# EAGLE board m14500v1 (EAGLE 3.55), part 1 of 2
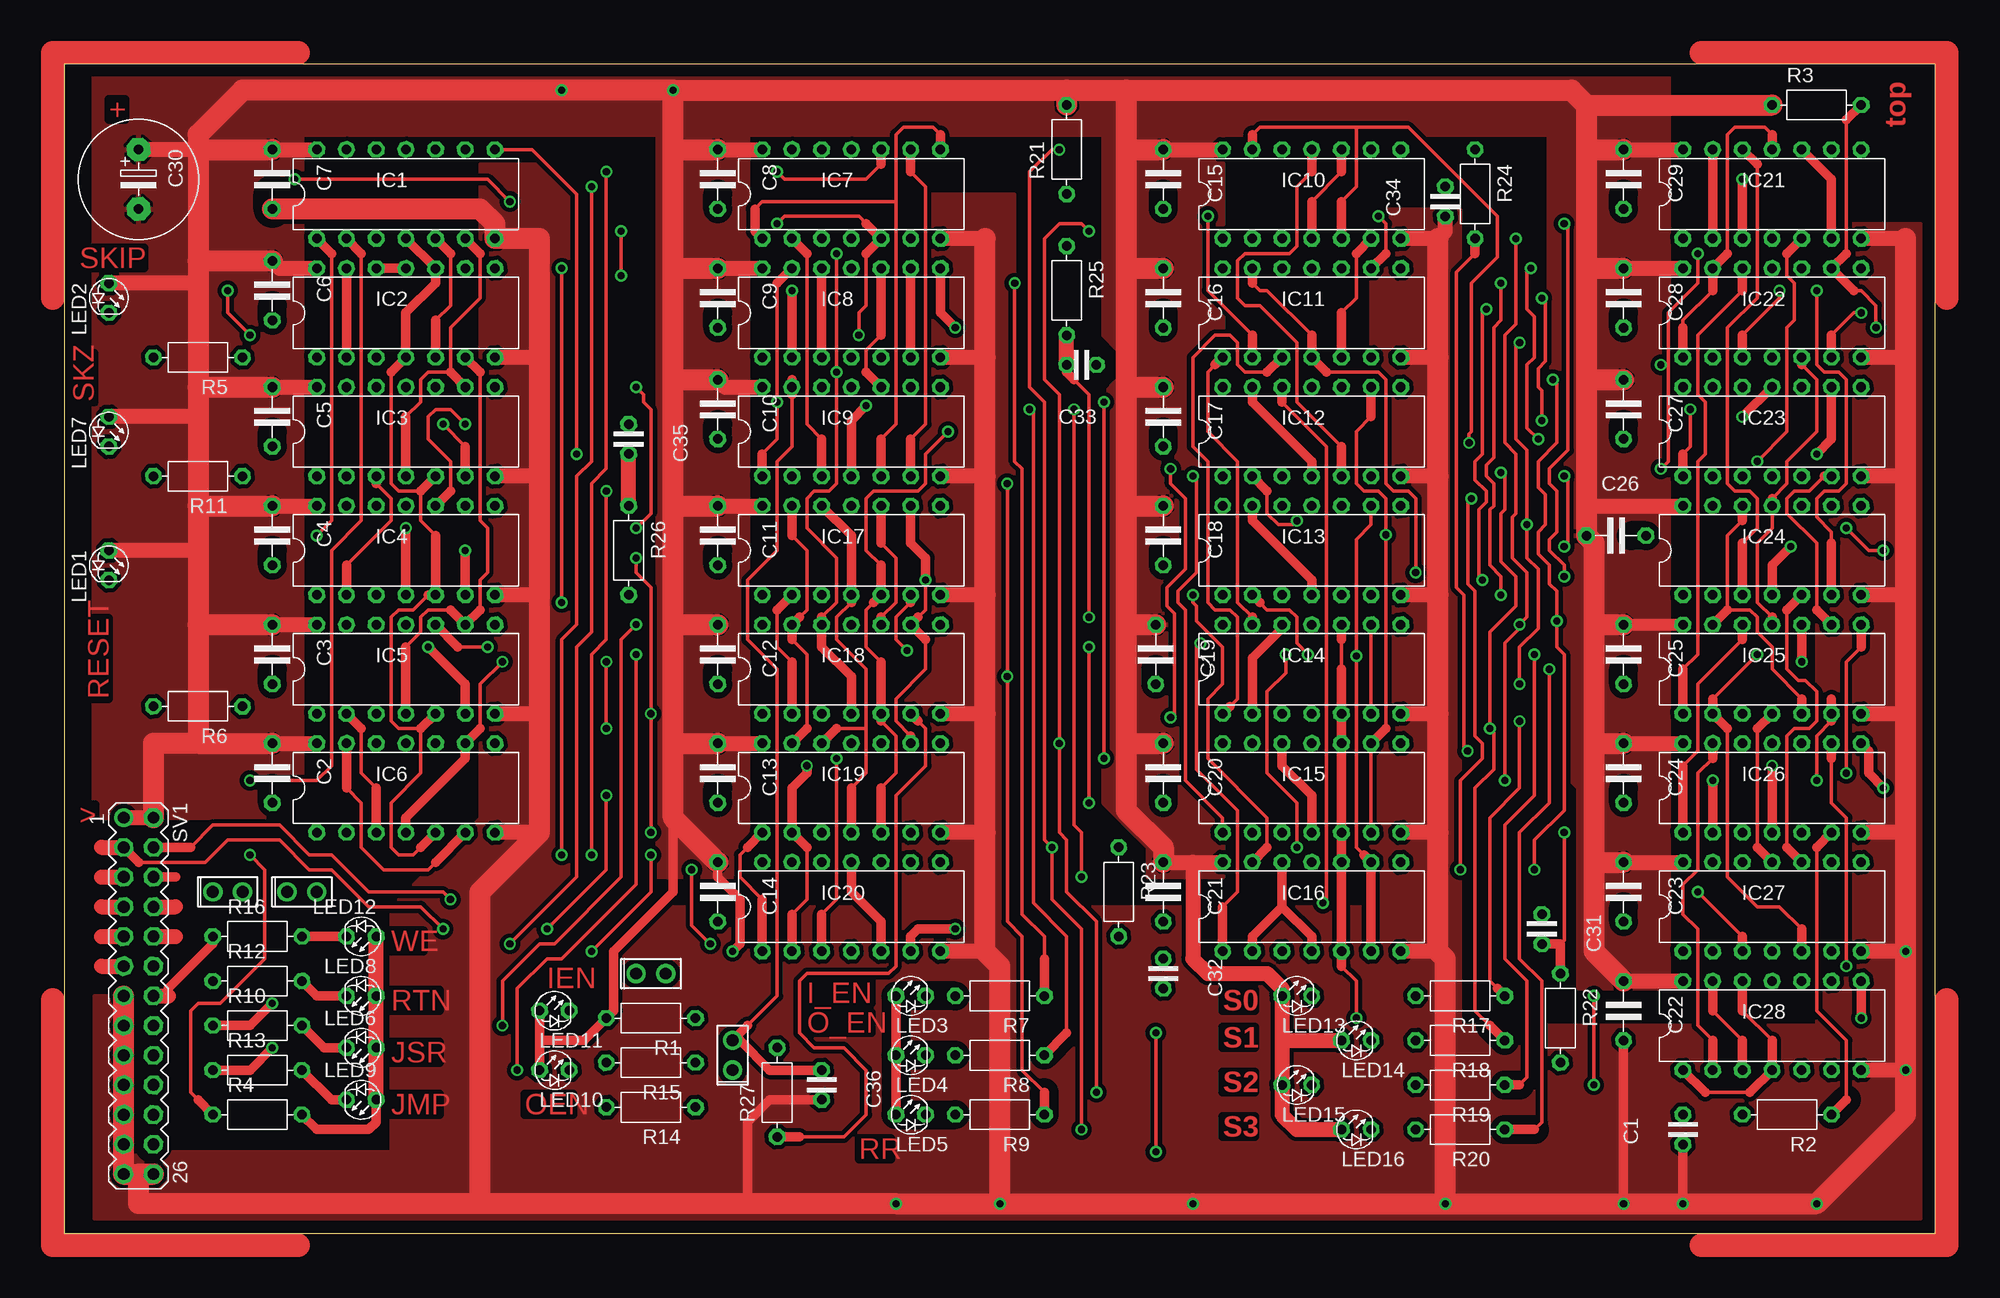
[diagram p0: board, top side]
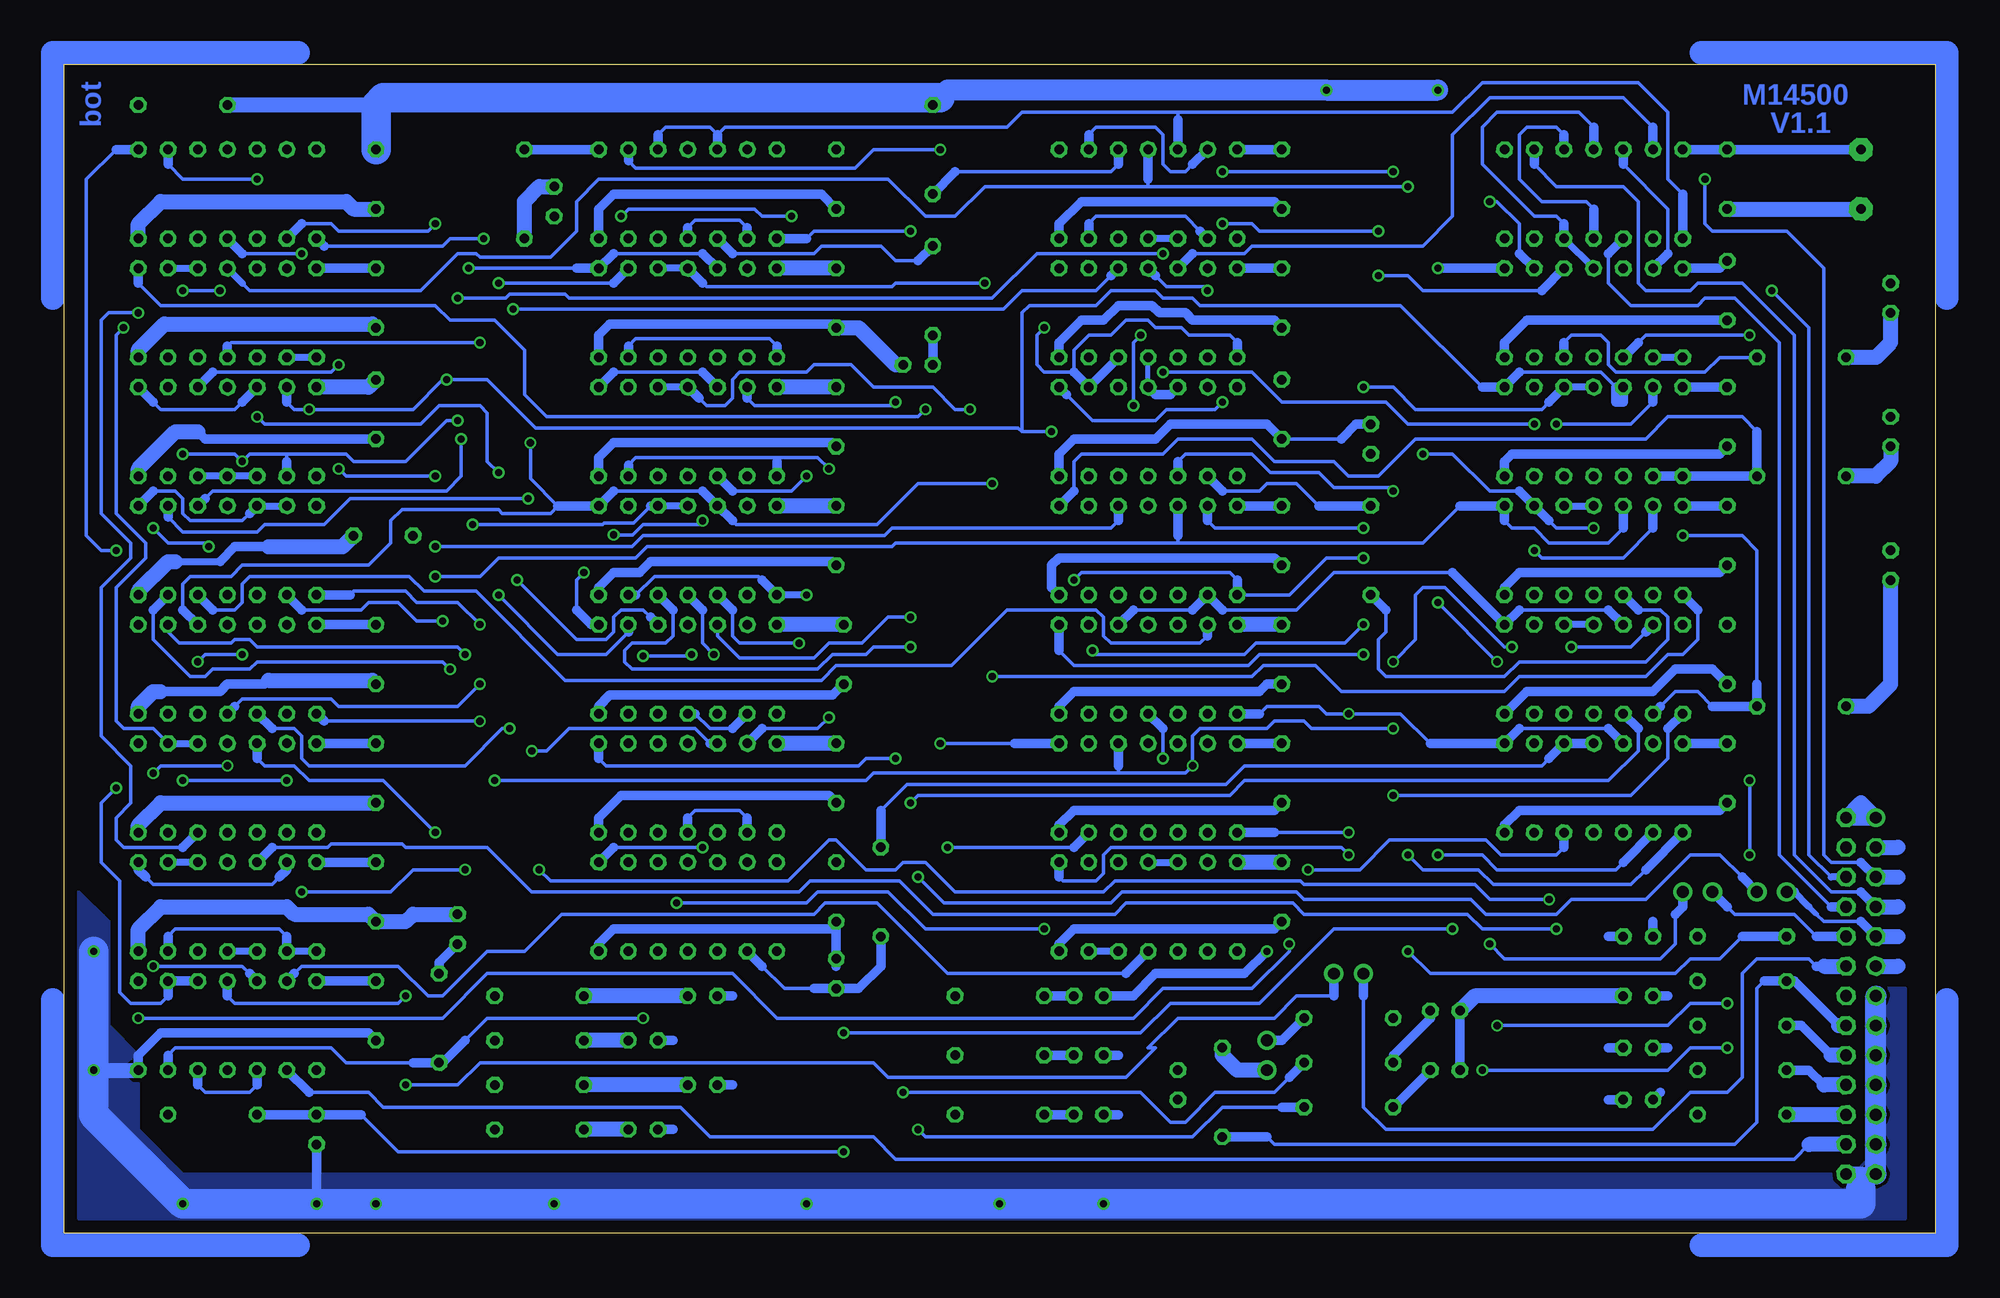
[diagram p1: board, bottom side, seen from below]

Size 160 x 100 mm. Coordinates in mm from the lower left corner, seen from the top.
Outline: 0,0 160,0 160,100 0,100 0,0
Copper layers used: Top, Bottom
tRestrict: 44 lines

## Footprints (pad centres in the part's own frame; a part is rotated, then mirrored left to right if it is on the bottom)
2,5 = drill 0.813 pad 1.397 octagon:  -1.27,0;  1.27,0
5 = drill 0.813 pad 1.397 octagon:  -2.54,0;  2.54,0
-5 = drill 0.813 pad 2.007 octagon:  -2.54,0;  2.54,0
L-14 = drill 0.813 pad 1.397 octagon:  -7.62,-3.81;  -5.08,-3.81;  7.62,-3.81;  7.62,3.81;  -2.54,-3.81;  0,-3.81;  5.08,-3.81;  2.54,-3.81;  5.08,3.81;  2.54,3.81;  0,3.81;  -2.54,3.81;  -5.08,3.81;  -7.62,3.81
L-2 = drill 1.016 pad 1.651 round:  1.27,0;  -1.27,0
D-3S = drill 0.813 pad 1.397 octagon:  -1.27,0;  1.27,0
7,5 = drill 0.813 pad 1.397 octagon:  -3.81,0;  3.81,0
13-2 = drill 1.016 pad 1.6 round:  -15.24,-1.27 | drill 1.016 pad 1.6 octagon:  -12.7,-1.27;  -10.16,-1.27;  -7.62,-1.27;  -5.08,-1.27;  -2.54,-1.27;  -15.24,1.27;  -12.7,1.27;  -10.16,1.27;  -7.62,1.27;  -5.08,1.27;  -2.54,1.27;  0,-1.27;  0,1.27;  2.54,-1.27;  5.08,-1.27;  7.62,-1.27;  10.16,-1.27;  12.7,-1.27;  15.24,-1.27;  2.54,1.27;  5.08,1.27;  7.62,1.27;  10.16,1.27;  12.7,1.27;  15.24,1.27

## Placement (x,y rotation side)
C1  220p  [2,5]  138.43,8.89 90 top
C2  100n  [5]  17.78,39.37 270 top
C3  100n  [5]  17.78,49.53 270 top
C4  100n  [5]  17.78,59.69 270 top
C5  100n  [5]  17.78,69.85 270 top
C6  100n  [5]  17.78,80.64 270 top
C7  100n  [5]  17.78,90.17 270 top
C8  100n  [5]  55.88,90.17 270 top
C9  100n  [5]  55.88,80.01 270 top
C10  100n  [5]  55.88,70.48 270 top
C11  100n  [5]  55.88,59.69 270 top
C12  100n  [5]  55.88,49.53 270 top
C13  100n  [5]  55.88,39.37 270 top
C14  100n  [5]  55.88,29.21 270 top
C15  100n  [5]  93.98,90.17 270 top
C16  100n  [5]  93.98,80.01 270 top
C17  100n  [5]  93.98,69.85 270 top
C18  100n  [5]  93.98,59.69 270 top
C19  100n  [5]  93.34,49.53 270 top
C20  100n  [5]  93.98,39.37 270 top
C21  100n  [5]  93.98,29.21 270 top
C22  100n  [5]  133.35,19.05 270 top
C23  100n  [5]  133.35,29.21 270 top
C24  100n  [5]  133.35,39.37 270 top
C25  100n  [5]  133.35,49.53 270 top
C26  100n  [5]  132.72,59.69 0 top
C27  100n  [5]  133.35,70.48 270 top
C28  100n  [5]  133.35,80.01 270 top
C29  100n  [5]  133.35,90.17 270 top
C30  ELC-5  [-5]  6.35,90.17 270 top
C31  1n  [2,5]  126.36,26.04 270 top
C32  220p  [2,5]  93.98,22.23 270 top
C33  220p  [2,5]  87,74.3 180 top
C34  220p  [2,5]  118.11,88.27 90 top
C35  220p  [2,5]  48.26,67.94 270 top
C36  220p  [2,5]  64.77,12.7 270 top
IC1  7410  [L-14]  29.21,88.9 0 top
IC2  7410  [L-14]  29.21,78.74 0 top
IC3  7400  [L-14]  29.21,68.58 0 top
IC4  7400  [L-14]  29.21,58.42 0 top
IC5  7400  [L-14]  29.21,48.26 0 top
IC6  7400  [L-14]  29.21,38.1 0 top
IC7  7400  [L-14]  67.31,88.9 0 top
IC8  7400  [L-14]  67.31,78.74 0 top
IC9  7410  [L-14]  67.31,68.58 0 top
IC10  7400  [L-14]  106.68,88.9 0 top
IC11  7400  [L-14]  106.68,78.74 0 top
IC12  7400  [L-14]  106.68,68.58 0 top
IC13  7400  [L-14]  106.68,58.42 0 top
IC14  7420  [L-14]  106.68,48.26 0 top
IC15  7420  [L-14]  106.68,38.1 0 top
IC16  7420  [L-14]  106.68,27.94 0 top
IC17  7420  [L-14]  67.31,58.42 0 top
IC18  7420  [L-14]  67.31,48.26 0 top
IC19  7420  [L-14]  67.31,38.1 0 top
IC20  7430  [L-14]  67.31,27.94 0 top
IC21  7400  [L-14]  146.05,88.9 0 top
IC22  7410  [L-14]  146.05,78.74 0 top
IC23  7400  [L-14]  146.05,68.58 0 top
IC24  7400  [L-14]  146.05,58.42 0 top
IC25  7410  [L-14]  146.05,48.26 0 top
IC26  7420  [L-14]  146.05,38.1 0 top
IC27  7410  [L-14]  146.05,27.94 0 top
IC28  7400  [L-14]  146.05,17.78 0 top
J1  JUMPII  [L-2]  57.15,15.24 90 top
J2  JUMPII  [L-2]  50.16,22.23 0 top
J3  JUMPII  [L-2]  13.97,29.21 0 top
J4  JUMPII  [L-2]  20.32,29.21 0 top
LED1  RES  [D-3S]  3.81,57.15 270 top
LED2  SKIP  [D-3S]  3.81,80.01 270 top
LED3  ENI  [D-3S]  72.39,20.32 0 top
LED4  ENO  [D-3S]  72.39,15.24 0 top
LED5  RR  [D-3S]  72.39,10.16 0 top
LED6  JSR  [D-3S]  25.4,15.88 180 top
LED7  SKZ  [D-3S]  3.81,68.58 270 top
LED8  RTN  [D-3S]  25.4,20.32 180 top
LED9  JMP  [D-3S]  25.4,11.43 180 top
LED10  OEN  [D-3S]  41.91,13.97 0 top
LED11  IEN  [D-3S]  41.91,19.05 0 top
LED12  WE  [D-3S]  25.4,25.4 180 top
LED13  LED-3S  [D-3S]  105.41,20.32 0 top
LED14  LED-3S  [D-3S]  110.49,16.51 0 top
LED15  LED-3S  [D-3S]  105.41,12.7 0 top
LED16  LED-3S  [D-3S]  110.49,8.89 0 top
R1  4k7  [7,5]  50.16,18.41 180 top
R2  220  [7,5]  147.32,10.16 180 top
R3  1k  [7,5]  149.86,96.52 0 top
R4  1k  [7,5]  16.51,10.16 0 top
R5  470  [7,5]  11.43,74.93 180 top
R6  470  [7,5]  11.43,45.09 180 top
R7  470  [7,5]  80.01,20.32 180 top
R8  470  [7,5]  80.01,15.24 180 top
R9  470  [7,5]  80.01,10.16 180 top
R10  470  [7,5]  16.51,17.78 0 top
R11  470  [7,5]  11.43,64.77 180 top
R12  470  [7,5]  16.51,21.59 0 top
R13  470  [7,5]  16.51,13.97 0 top
R14  470  [7,5]  50.16,10.79 180 top
R15  470  [7,5]  50.16,14.61 180 top
R16  470  [7,5]  16.51,25.4 0 top
R17  470  [7,5]  119.38,20.32 180 top
R18  470  [7,5]  119.38,16.51 180 top
R19  470  [7,5]  119.38,12.7 180 top
R20  470  [7,5]  119.38,8.89 180 top
R21  1k  [7,5]  85.72,92.71 90 top
R22  330  [7,5]  127.95,18.41 270 top
R23  330  [7,5]  90.17,29.21 270 top
R24  330  [7,5]  120.65,88.9 270 top
R25  330  [7,5]  85.72,80.64 270 top
R26  330  [7,5]  48.26,58.42 270 top
R27  330  [7,5]  60.96,12.06 90 top
SV1  MA13-2  [13-2]  6.35,20.32 270 top

## Library data of the parts
C1-C36 R1-R27 = DISCRETE
IC1-IC28 = 74XX
J1-J4 = JG
LED1-LED16 = M68XXX
SV1 = CON-LSTB

## Nets
!C0: IC3. IC17. IC18. IC19. IC24. IC27.
!C1: IC4. IC18. IC20. IC21. IC23.
!C2: IC5. IC19. IC20. IC21. IC24.
!C3: IC6. R23.
!C31: C32. IC16. R23.
!CLK: IC20. IC28.
!D_IN: IC24. IC25.
!I_EN: IC11. R7.
!IEN: IC10. IC19. R15.
!JMP: IC18. R13. SV1.
!JSR: IC17. R10. SV1.
!O_EN: IC12. R8.
!OEN: IC10. IC19. R14.
!RES: IC7. J4. R21.
!RES1: IC1. IC5. IC6. IC7. IC10. R6.
!RESOUT: IC22. J3.
!RR: IC4. IC10. IC13. IC25. IC27. R9.
!RTN: IC18. R12. R27. SV1.
!SK_Z: C35. IC9. R26.
!SKIP: IC1. IC2. R5.
!SKZ: IC3. IC17. R11.
!WE: IC20. R16. SV1.
!XSKIP: IC1. R4. SV1.
AQ: C1. IC5. R2.
C0: IC3. IC17. IC18. IC19. IC23. IC24. IC27.
C1: IC4. IC17. IC19. IC21.
C2: IC5. IC17. IC18. IC21. IC23.
C3: IC6. IC17. IC18. IC19. IC20.
CLK: IC26. IC28. SV1.
CLK1: IC1. IC2. IC3. IC4. IC5. IC6. IC7. IC9. IC28.
CLK2: IC8. IC9. IC14. IC15. IC16. IC28. R22.
CLKOUT: IC28. J2.
CMD0: IC1. SV1.
CMD1: IC1. SV1.
CMD2: IC2. SV1.
CMD3: IC2. SV1.
D_IN: IC22. IC24. IC25.
DIN: IC24. SV1.
DOUT: IC27. SV1.
GND: C1. C2. C3. C4. C5. C6. C7. C8. C9. C10. C11. C12. C13. C14. C15. C16. C17. C18. C19. C20. C21. C22. C23. C24. C25. C26. C27. C28. C29. C30. C31. C32. C33. C34. C35. C36. IC1. IC2. IC3. IC4. IC5. IC6. IC7. IC8. IC9. IC10. IC11. IC12. IC13. IC14. IC15. IC16. IC17. IC18. IC19. IC20. IC21. IC22. IC23. IC24. IC25. IC26. IC27. IC28. SV1.
I_EN: IC11. IC24.
N$9: IC1. IC3.
N$10: IC1. IC4.
N$11: IC2. IC5.
N$12: IC2. IC6.
N$13: IC6.
N$14: IC5.
N$15: IC4.
N$16: IC3.
N$17: C36. IC9. J1. R1.
N$18: IC8. IC9.
N$19: IC8. IC9.
N$20: IC8. IC9.
N$21: IC8.
N$22: IC6. IC7. IC9.
N$23: IC7. IC9.
N$24: IC7. IC9.
N$25: IC7.
N$26: IC10. IC12.
N$27: C34. IC15. R24.
N$28: IC1. IC8.
N$29: IC8.
N$30: IC3. IC4.
N$31: IC1. IC2.
N$32: LED2. R5.
N$33: IC12. IC15.
N$34: IC12. IC15.
N$35: IC12. IC15.
N$36: IC12. IC15.
N$37: IC11. IC14.
N$38: IC10. IC11.
N$39: C33. IC14. R25.
N$40: IC11. IC14.
N$41: IC11. IC14.
N$42: IC11. IC14.
N$43: IC5. IC13.
N$44: IC13. IC16.
N$45: IC13. IC16.
N$46: IC13. IC16.
N$47: IC13. IC16.
N$48: SV1.
N$49: IC21.
N$50: IC21.
N$51: IC26. IC28.
N$52: C31. IC26. R22.
N$53: IC21. IC24.
N$54: IC25. IC26.
N$55: IC25. IC26.
N$56: IC22. IC26.
N$57: IC25. IC26.
N$58: IC26. R2.
N$59: IC27.
N$60: IC27.
N$61: LED3. R7.
N$62: IC22. IC26. IC28. R3.
N$63: LED1. R6.
N$64: LED4. R8.
N$65: LED5. R9.
N$66: LED8. R12.
N$67: LED6. R10.
N$68: LED7. R11.
N$69: LED11. R15.
N$70: LED10. R14.
N$71: LED9. R13.
N$72: LED12. R16.
N$73: LED13. R17.
N$74: LED14. R18.
N$75: LED15. R19.
N$76: LED16. R20.
N$77: J2. SV1.
N$78: J4. SV1.
N$79: J3. SV1.
N$80: IC23.
N$81: IC21. IC24.
N$82: IC21. IC22.
N$83: IC23.
N$85: IC10. R25.
N$86: IC10. R24.
N$87: IC4. R26.
N$88: J1. R27.
O_EN: IC12. IC20.
RES1: IC6. IC7. IC22.
RR: IC13. IC22. IC25. IC27.
S0: IC22. IC25. R17.
S1: IC23. IC25. R18.
S2: IC23. IC25. R19.
S3: IC22. IC24. R20.
VCC: C2. C3. C4. C5. C6. C7. C8. C9. C10. C11. C12. C13. C14. C15. C16. C17. C18. C19. C20. C21. C22. C23. C24. C25. C26. C27. C28. C29. C30. IC1. IC2. IC3. IC4. IC5. IC6. IC7. IC8. IC9. IC10. IC11. IC12. IC13. IC14. IC15. IC16. IC17. IC18. IC19. IC20. IC21. IC22. IC23. IC24. IC25. IC26. IC27. IC28. LED1. LED2. LED3. LED4. LED5. LED6. LED7. LED8. LED9. LED10. LED11. LED12. LED13. LED14. LED15. LED16. R1. R3. R4. R21. SV1.

## Tracks (layer width: path | path; a pad name or v marks a point on that pad's centre or on a via)
!C0  (via drill 0.61 pad 1.02)
  Top 0.305: 63.5,43.18 63.5,49.53 62.23,50.8 | 62.23,59.69 63.5,58.42 63.5,53.34 62.87,52.7 | v48.9,72.39 49.53,71.75 49.53,71.12 50.16,70.48 50.16,61.59 v48.9,60.33 | 147.32,33.02 147.32,42.55 147.96,43.18 149.22,43.18 149.86,43.81 149.86,46.35 148.91,47.31 148.27,47.31 147.32,48.26 147.32,53.34
  Top 0.813: 62.23,62.23 62.23,59.69 | 63.5,43.18 62.23,41.91 | 62.87,52.7 62.23,52.07 62.23,50.8 | 147.32,33.02 148.59,31.75 | 148.59,54.61 147.32,53.34
  Bottom 0.305: 33.02,71.12 33.66,70.48 44.45,70.48 46.35,72.39 v48.9,72.39 | 62.23,60.96 61.59,60.33 v48.9,60.33 | 62.23,51.12 62.87,50.48 70.48,50.48 71.12,51.12 71.12,52.7 71.75,53.34 79.38,53.34 84.14,48.58 93.98,48.58 95.25,47.31 117.16,47.31 124.78,54.93 129.22,54.93 130.49,56.2 144.15,56.2 144.78,55.56 144.78,53.98 145.41,53.34 147.32,53.34
  Bottom 0.61: 29.21,72.39 31.75,72.39 | 148.59,31.75 151.13,31.75
  Bottom 0.813: 62.23,60.96 62.23,62.23 | 62.23,52.07 62.23,51.12 | 147.32,53.34 148.59,54.61 | 31.75,72.39 33.02,71.12
!C1  (via drill 0.61 pad 1.02)
  Top 0.305: 33.02,63.5 33.02,66.04 31.11,67.94 31.11,69.85 31.75,70.48 33.02,70.48 v34.29,69.22 | 64.77,27.3 66.04,28.57 v66.04,40.64 | 64.77,52.7 66.04,53.98 66.04,57.78 63.5,60.33 63.5,62.87 64.14,63.5 65.41,63.5 66.04,64.14 v66.04,73.66 v66.04,83.82 | v126.36,80.01 126.68,79.69 126.68,74.61 126.05,73.98 126.05,72.39 126.36,72.07 v126.36,69.53 | v144.78,66.04 147.32,68.58 147.32,77.47 147.96,78.11 147.96,81.28 147.32,81.92 147.32,83.82
  Top 0.813: 33.02,63.5 31.75,62.23 | 67.31,44.45 67.31,47.62 64.77,50.16 64.77,52.07 64.77,52.7 | 64.77,24.13 64.77,27.3 | 147.32,83.82 148.59,85.09 | v149.86,66.67 151.13,67.94 151.13,72.39
  Bottom 0.305: 140.97,66.67 135.89,66.67 135.25,66.04 130.81,66.04 127.32,69.53 v126.36,69.53 | 140.97,66.67 144.15,66.67 v144.78,66.04 145.41,66.67 v149.86,66.67 | v66.04,40.64 66.04,43.18 | v34.29,69.22 45.09,69.22 46.99,71.12 55.88,71.12 58.42,73.66 v66.04,73.66 | v66.04,83.82 76.83,83.82 80.64,80.01 116.84,80.01 117.16,80.33 121.92,80.33 122.24,80.01 v126.36,80.01 | 140.97,66.67 140.97,66.04
  Bottom 0.61: 31.75,62.23 29.21,62.23
  Bottom 0.813: 66.04,43.18 67.31,44.45 | 140.97,66.04 140.97,64.77
!C2  (via drill 0.61 pad 1.02)
  Top 0.305: 33.66,50.16 v36.2,50.16 | 62.23,27.3 63.5,28.57 63.5,33.02 | v46.35,48.9 v46.35,43.18 | v123.19,38.73 123.19,50.48 124.46,51.75 v124.46,52.07 125.09,52.7 125.09,56.52 123.83,57.78 123.83,61.28 124.14,61.59 124.14,66.67 123.19,67.63 123.19,76.83 124.14,77.79 v124.14,85.09
  Top 0.813: 31.75,52.07 33.66,50.16 | 62.23,27.3 62.23,24.13 | 63.5,33.02 62.23,34.29 62.23,38.1 63.5,39.37 v63.5,40.01
  Bottom 0.305: v36.2,50.16 36.83,50.16 41.91,55.24 43.81,55.24 44.45,54.61 44.45,50.8 v46.35,48.9 | 69.85,39.37 64.14,39.37 v63.5,40.01 63.5,42.55 62.87,43.18 57.15,43.18 56.52,43.81 53.98,43.81 53.34,43.18 v46.35,43.18 | 69.85,39.37 69.85,40.01 | 69.85,39.37 90.81,39.37 91.44,38.73 v123.19,38.73 | 135.57,54.61 135.25,54.93 130.81,54.93 129.86,53.98 126.36,53.98 v124.46,52.07 | v124.14,85.09 127,85.09 127.64,84.45 137.79,84.45
  Bottom 0.61: 29.21,52.07 31.75,52.07
  Bottom 0.813: 135.57,54.61 138.43,54.61 | 137.79,84.45 138.43,85.09 | 69.85,40.01 69.85,41.91
!C3
  Bottom 0.305: 33.02,40.64 33.66,40.01 59.05,40.01 60.64,38.42 87.95,38.42 90.17,36.2
  Bottom 0.813: 33.02,40.64 31.75,41.91 29.21,41.91 | 90.17,36.2 90.17,33.02
!C31
  Top 0.813: 104.14,27.94 104.14,31.75 | 104.14,27.94 106.68,25.4 106.68,24.13 | 101.6,24.13 101.6,25.4 104.14,27.94
  Bottom 0.305: 100.33,22.86 98.42,20.95 95.89,20.95
  Bottom 0.813: 100.33,22.86 101.6,24.13 | 95.89,20.95 C32. 92.08,20.95 90.17,22.86 R23.
!CLK
  Top 0.305: 140.97,19.05 143.51,16.51
  Top 0.813: 143.51,16.51 143.51,13.97 | 140.97,21.59 140.97,19.05
  Bottom 0.305: 148.59,12.7 147.96,12.06 144.15,12.06 143.51,12.7 | 140.34,22.23 139.7,22.86 131.44,22.86 128.91,20.32 127.64,20.32 123.83,24.13 120.65,24.13 117.47,27.3 95.89,27.3 94.93,28.26 90.49,28.26 84.45,22.23 69.22,22.23
  Bottom 0.813: 148.59,12.7 148.59,13.97 | 143.51,13.97 143.51,12.7 | 67.31,24.13 69.22,22.23 | 140.34,22.23 140.97,21.59
!D_IN
  Top 0.305: 148.59,45.72 146.05,48.26 146.05,50.16 144.78,51.44 144.78,52.7 144.15,53.34 142.24,53.34 142.24,59.69 143.51,60.96
  Top 0.813: 140.97,52.07 142.24,53.34 | 148.59,45.72 148.59,44.45 | 143.51,60.96 143.51,62.23
  Bottom 0.305: 152.4,63.5 150.5,63.5 149.86,62.87 149.86,61.59 149.22,60.96 144.78,60.96 144.15,61.59
  Bottom 0.61: 143.51,62.23 140.97,62.23
  Bottom 0.813: 152.4,63.5 153.67,62.23 | 143.51,62.23 144.15,61.59
!I_EN  (via drill 0.61 pad 1.02)
  Top 0.305: 83.82,23.5 83.82,25.4 81.92,27.3 81.92,65.41 81.28,66.04 v81.28,81.28
  Top 0.813: 83.82,20.32 83.82,23.5
  Bottom 0.305: 105.41,81.28 105.09,80.96 89.22,80.96 88.9,81.28 v81.28,81.28
  Bottom 0.61: 106.68,82.55 109.22,82.55
  Bottom 0.813: 105.41,81.28 106.68,82.55
!IEN  (via drill 0.61 pad 1.02)
  Top 0.305: v88.27,12.06 88.27,26.67 85.72,29.21 85.72,33.66 85.09,34.29 v85.09,41.91 85.09,71.75 83.82,73.03 83.82,85.09 85.09,86.36 87,86.36 v87.63,85.72
  Bottom 0.305: 55.24,13.34 56.52,12.06 61.59,12.06 64.14,9.53 65.41,9.53 67.94,12.06 v88.27,12.06 | v85.09,41.91 78.74,41.91 | 96.52,85.09 95.89,85.72 v87.63,85.72
  Bottom 0.813: 53.98,14.61 55.24,13.34 | 96.52,85.09 99.06,85.09 | 78.74,41.91 74.93,41.91
!JMP  (via drill 0.61 pad 1.02)
  Top 0.305: v48.9,49.53 48.9,29.84 42.55,23.5 41.27,23.5 38.73,20.95 v38.73,13.97
  Top 0.813: 12.7,13.97 15.88,13.97 v17.78,15.88
  Bottom 0.305: v17.78,15.88 20.95,15.88 22.86,13.97 v38.73,13.97 | 74.93,49.85 73.66,48.58 58.74,48.58 57.78,49.53 v48.9,49.53
  Bottom 0.813: 9.53,12.7 10.79,13.97 12.7,13.97 | 74.93,49.85 74.93,52.07
  Bottom 1.27: 7.62,12.7 9.53,12.7
!JSR  (via drill 0.61 pad 1.02)
  Top 0.305: 72.39,53.98 71.12,52.7 71.12,50.8 v72.07,49.85 | v48.9,52.07 47.62,50.8 47.62,30.48 41.91,24.77 40.64,24.77 37.47,21.59 v37.47,17.78
  Top 0.813: 12.7,17.78 15.88,17.78 v17.78,19.68 | 72.39,53.98 72.39,54.61
  Bottom 0.305: v17.78,19.68 20.95,19.68 22.86,17.78 v37.47,17.78 | v72.07,49.85 71.75,49.53 59.05,49.53 58.1,50.48 50.48,50.48 v48.9,52.07
  Bottom 0.813: 8.89,15.24 11.43,17.78 12.7,17.78
  Bottom 1.27: 7.62,15.24 8.89,15.24
!O_EN  (via drill 0.61 pad 1.02)
  Top 0.305: 85.72,17.14 85.72,25.4 82.87,28.26 82.87,70.17 v82.55,70.48
  Top 0.813: 83.82,15.24 85.72,17.14
  Bottom 0.305: 105.73,71.44 105.09,70.8 103.5,70.8 102.87,71.44 102.87,73.03 102.23,73.66 96.52,73.66 95.89,74.3 92.71,74.3 90.81,72.39 85.72,72.39 83.82,70.48 v82.55,70.48
  Bottom 0.61: 106.68,72.39 109.22,72.39
  Bottom 0.813: 105.73,71.44 106.68,72.39
!OEN  (via drill 0.61 pad 1.02)
  Top 0.305: v87,8.89 87,26.04 84.45,28.57 v84.45,33.02 83.82,33.66 83.82,71.12 82.55,72.39 82.55,90.81 84.45,92.71 v85.09,92.71
  Bottom 0.305: 55.88,10.79 60.96,10.79 63.5,8.26 86.36,8.26 v87,8.89 | v84.45,33.02 73.66,33.02 | v85.09,92.71 90.81,92.71 92.39,91.12 111.12,91.12 111.76,91.76
  Bottom 0.813: 73.66,33.02 72.39,34.29 | 111.76,91.76 111.76,92.71 | 53.98,10.79 55.88,10.79
!RES  (via drill 0.61 pad 1.02)
  Top 0.305: 69.85,91.44 68.58,90.17 61.59,90.17 v60.96,90.81 | v38.1,24.77 43.81,30.48 43.81,50.16 45.09,51.44 45.09,64.14 46.35,65.41 v46.35,90.81
  Top 0.813: 69.85,91.44 69.85,92.71
  Bottom 0.305: 69.85,91.44 70.48,90.81 83.82,90.81 | v46.35,90.81 v60.96,90.81 | 22.23,27.3 22.23,24.77 23.5,23.5 36.83,23.5 v38.1,24.77
  Bottom 0.813: 69.85,92.71 69.85,91.44 | 83.82,90.81 85.72,88.9 | 22.23,27.3 21.59,27.94 21.59,29.21
!RES1  (via drill 0.61 pad 1.02)
  Top 0.305: 22.86,83.82 22.86,60.96 v21.59,59.69 | 25.4,43.18 25.4,39.37 26.67,38.1 | 109.22,90.81 106.68,88.27
  Top 0.813: 22.86,83.82 21.59,85.09 | 24.13,44.45 25.4,43.18 | 26.67,38.1 26.67,34.29 | 106.68,88.27 106.68,85.09 | 109.22,92.71 109.22,90.81
  Bottom 0.305: 21.59,88.9 22.86,90.17 22.86,95.89 25.4,98.42 38.73,98.42 41.27,95.89 64.77,95.89 | 23.5,45.09 22.23,46.35 20.32,46.35 19.05,45.09 | 15.24,46.99 15.24,58.42 16.51,59.69 v21.59,59.69 | 101.6,86.04 102.23,86.68 106.05,86.68 106.68,86.04 | 109.22,93.98 108.58,94.61 104.78,94.61 104.14,93.98 103.5,94.61 79.38,94.61 78.11,95.89 64.77,95.89 | 64.77,95.89 64.77,95.25
  Bottom 0.813: 21.59,85.09 21.59,88.9 | 19.05,45.09 15.24,45.09 15.24,46.99 | 101.6,86.04 101.6,85.09 | 106.68,85.09 106.68,86.04 | 109.22,93.98 109.22,92.71 | 104.14,93.98 104.14,92.71 | 64.77,95.25 64.77,92.71 | 23.5,45.09 24.13,44.45
!RESOUT  (via drill 0.61 pad 1.02)
  Top 0.305: v87,30.48 87,34.29 86.36,34.92 v86.36,70.48
  Bottom 0.305: 153.67,81.28 151.76,79.38 128.27,79.38 127,78.11 123.19,78.11 120.65,75.56 120.65,71.75 118.75,69.85 87,69.85 v86.36,70.48 | 16.51,30.48 18.41,32.38 20.95,32.38 24.77,28.57 31.11,28.57 32.38,27.3 38.42,27.3 39.69,28.57 53.98,28.57 54.61,29.21 69.53,29.21 70.48,28.26 84.77,28.26 v87,30.48
  Bottom 0.813: 153.67,81.28 153.67,82.55 | 15.24,29.21 16.51,30.48
!RR  (via drill 0.61 pad 1.02)
  Top 0.305: 101.6,93.98 102.23,94.61 110.49,94.61 | 110.49,94.61 110.49,89.53 109.22,88.27 | 110.49,94.61 114.94,94.61 122.56,87 122.56,83.5 120.33,81.28 120.33,68.58 120.14,68.39 v120.14,67.63 | v80.64,64.14 v80.64,47.62 80.64,26.67 81.92,25.4 81.92,13.97 83.82,12.06 | 142.24,43.18 142.24,30.48 144.78,27.94 146.69,27.94 148.59,26.04 | v144.78,49.53 140.97,45.72
  Top 0.813: 101.6,93.98 101.6,92.71 | 109.22,88.27 109.22,85.09 | 83.82,12.06 83.82,10.16 | 142.24,43.18 140.97,44.45 140.97,45.72 | 148.59,26.04 148.59,24.13 | 148.59,52.07 v148.59,48.9
  Bottom 0.305: 20.32,53.34 20.32,50.8 21.59,49.53 22.86,49.53 24.77,47.62 35.56,47.62 36.83,46.35 50.8,46.35 53.02,48.58 57.47,48.58 58.42,47.62 v80.64,47.62 | 105.41,63.5 113.03,63.5 | 102.87,60.96 102.55,60.64 90.49,60.64 87,64.14 v80.64,64.14 | v120.14,67.63 120.14,64.58 117.79,62.23 118.43,61.59 122.56,61.59 122.87,61.91 131.13,61.91 132.08,60.96 132.08,59.05 133.99,57.15 144.78,57.15 145.73,56.2 149.22,56.2 149.86,55.56 149.86,53.34 | v148.59,48.9 147.96,49.53 v144.78,49.53
  Bottom 0.813: 20.32,53.34 21.59,54.61 | 105.41,63.5 104.14,62.23 102.87,60.96 | 113.03,63.5 114.3,62.23 117.79,62.23 | 149.86,53.34 148.59,52.07
!RTN
  Top 0.305: 73.03,43.81 73.66,43.18 73.66,40.01 71.12,37.47 71.12,22.86 70.48,22.23 63.5,22.23 62.87,21.59 62.87,17.14 64.14,15.88 66.67,15.88 68.58,13.97 68.58,10.16 66.67,8.26 62.87,8.26
  Top 0.813: 73.03,43.81 72.39,44.45 | 60.96,8.26 62.87,8.26
  Bottom 0.305: 14.61,21.59 15.24,20.95 15.24,9.53 17.14,7.62 56.52,7.62 57.15,8.26
  Bottom 0.813: 8.26,17.78 12.06,21.59 12.7,21.59 14.61,21.59 | 57.15,8.26 60.96,8.26
  Bottom 1.27: 8.26,17.78 7.62,17.78
!SK_Z
  Top 1.27: 48.26,62.23 C35.
  Bottom 0.305: 60.96,63.5 57.78,63.5 57.15,64.14 54.61,64.14 52.7,62.23
  Bottom 0.813: 60.96,63.5 62.23,64.77 | 48.26,62.23 52.7,62.23
!SKIP
  Top 0.305: 31.75,78.11 33.02,79.38 33.02,83.82
  Top 0.813: 29.21,82.55 26.67,82.55 | 31.75,74.93 31.75,78.11 | 33.02,83.82 31.75,85.09
  Bottom 0.305: 15.24,74.93 18.41,74.93 19.68,73.66 27.3,73.66 27.94,74.3 27.94,76.2 28.57,76.83 31.11,76.83 31.75,76.2 | 29.21,94.61 30.48,95.89 37.47,95.89 38.73,94.61 38.73,91.44 34.29,87 32.38,87 31.75,86.36
  Bottom 0.61: 31.75,85.09 29.21,82.55
  Bottom 0.813: 31.75,76.2 31.75,74.93 | 29.21,94.61 29.21,92.71 | 31.75,85.09 31.75,86.36
!SKZ
  Bottom 0.305: 15.24,68.58 16.51,69.85 22.86,69.85 24.77,67.94 44.45,67.94 47.62,64.77 50.16,64.77 51.44,66.04 56.52,66.04 58.42,67.94 64.77,67.94 66.04,66.67 73.03,66.67 73.66,66.04 73.66,63.5
  Bottom 0.813: 24.13,64.77 21.59,64.77 15.24,64.77 15.24,68.58 | 73.66,63.5 74.93,62.23
!WE  (via drill 0.61 pad 1.02)
  Top 0.305: v45.09,24.13 50.16,29.21 v50.16,32.38
  Top 0.813: 8.89,20.32 8.89,20.95 12.7,24.77 12.7,25.4
  Top 1.27: 7.62,20.32 8.89,20.32
  Bottom 0.305: 74.93,30.48 74.61,30.16 71.75,30.16 71.12,30.8 71.12,32.38 70.48,33.02 50.8,33.02 v50.16,32.38 | 16.51,25.4 18.41,23.5 20.95,23.5 22.23,22.23 43.18,22.23 v45.09,24.13
  Bottom 0.813: 74.93,30.48 74.93,31.75 | 12.7,25.4 16.51,25.4
!XSKIP  (via drill 0.61 pad 1.02)
  Top 0.305: 25.4,83.82 25.4,60.96 22.86,58.42 22.86,40.01 21.59,38.73 v15.88,38.73 | v15.88,32.38 17.14,31.11 17.14,23.5 13.34,19.68 11.43,19.68 10.79,19.05 10.79,12.06 11.43,11.43
  Top 0.813: 25.4,83.82 24.13,85.09 | 12.7,10.16 11.43,11.43
  Bottom 0.305: v15.88,32.38 v15.88,38.73
  Bottom 1.27: 7.62,10.16 12.7,10.16
AQ  (via drill 0.61 pad 1.02)
  Top 0.305: v93.34,17.14 v93.34,6.99 | v41.27,26.04 46.35,31.11 v46.35,37.47
  Bottom 0.305: 22.86,43.18 22.86,40.64 26.04,37.47 v46.35,37.47 | 134.62,10.16 131.44,6.99 v93.34,6.99 | v93.34,17.14 67.94,17.14 65.41,19.68 57.78,19.68 51.44,26.04 v41.27,26.04
  Bottom 0.813: R2. C1. 134.62,10.16 | 22.86,43.18 21.59,44.45
C0  (via drill 0.61 pad 1.02)
  Top 0.305: 69.22,53.98 68.58,53.34 68.58,50.16 69.85,48.9 | 69.85,43.81 71.12,42.55 71.12,39.37 69.85,38.1 | 69.85,57.15 68.58,58.42 68.58,62.87 69.22,63.5 73.03,63.5 73.66,64.14 73.66,66.67 v75.56,68.58 | v127.32,73.03 127.64,72.71 127.64,67.63 126.05,66.04 126.05,63.82 126.68,63.18 126.68,60.64 126.05,60.01 126.05,58.1 127,57.15 127,55.56 127.64,54.93 v127.64,52.39 127.64,50.16 128.27,49.53 128.27,36.2 125.73,33.66 v125.73,31.11 | v139.7,29.21 143.51,25.4 | 138.43,66.67 139.06,67.31 v139.06,70.48
  Top 0.813: 69.85,48.9 69.85,44.45 69.85,43.81 | 69.85,38.1 69.85,34.29 | 69.85,57.15 69.85,54.61 69.22,53.98 | 143.51,25.4 143.51,24.13 | 138.43,66.67 138.43,64.77
  Bottom 0.305: 27.3,72.39 28.57,73.66 35.56,73.66 | 38.73,72.39 45.72,79.38 62.87,79.38 63.5,80.01 66.04,80.01 66.67,80.64 70.48,80.64 71.75,79.38 77.47,79.38 78.11,78.74 78.11,68.58 | 78.11,68.58 78.42,68.9 119.7,68.9 123.83,73.03 v127.32,73.03 127.64,73.03 130.18,70.48 v139.06,70.48 140.34,70.48 140.97,71.12 | 78.11,68.58 v75.56,68.58 | v127.64,52.39 129.86,52.39 131.44,53.98 133.99,53.98 134.62,53.34 139.7,53.34 | v125.73,31.11 130.18,31.11 132.08,29.21 v139.7,29.21
  Bottom 0.61: 143.51,24.13 146.05,24.13
  Bottom 0.813: 35.56,73.66 36.83,72.39 38.73,72.39 | 139.7,53.34 140.97,54.61 | 140.97,71.12 140.97,72.39 | 26.67,72.39 27.3,72.39 27.3,71.12 26.67,71.12 26.67,72.39
C1  (via drill 0.61 pad 1.02)
  Top 0.305: 68.58,43.18 68.58,39.37 67.31,38.1 | 67.31,53.98 66.04,52.7 66.04,50.8 68.58,48.26 68.58,43.18 | 68.58,43.18 66.04,43.18 | v128.27,56.2 128.27,57.15 127,58.42 127,59.37 127.64,60.01 127.64,63.5 127,64.14 127,65.41 128.59,66.99 128.59,86.04 v128.27,86.36
  Top 0.813: 64.77,62.23 67.31,59.69 67.31,54.61 67.31,53.98 | 67.31,38.1 67.31,34.29 | 66.04,43.18 64.77,41.91 | 140.97,85.09 140.97,92.71
  Bottom 0.305: 26.67,60.33 27.94,59.05 33.02,59.05 34.29,60.33 36.2,60.33 36.83,60.96 | 64.77,59.05 64.77,59.69 | 64.77,59.05 43.81,59.05 40.64,62.23 | 64.77,59.05 88.9,59.05 89.22,58.74 110.17,58.74 111.12,57.78 122.87,57.78 124.46,56.2 v128.27,56.2 128.59,56.2 | v128.27,86.36 128.91,85.72 136.53,85.72 137.16,86.36 139.7,86.36
  Bottom 0.813: 26.67,60.33 26.67,62.23 | 36.83,60.96 36.83,62.23 40.64,62.23 | 139.7,86.36 140.97,85.09 | 64.77,59.69 64.77,62.23
C2  (via drill 0.61 pad 1.02)
  Top 0.305: 69.85,59.05 71.12,57.78 71.12,53.98 69.85,52.7 | 60.96,53.34 60.96,50.16 62.23,48.9 | v128.27,58.74 128.59,59.05 128.59,64.45 v128.27,64.77 | v139.7,83.82 139.7,81.28 137.16,78.74 137.16,74.3 | 137.16,74.3 137.16,66.04 v136.53,65.41 | 137.16,74.3 v136.53,74.3
  Top 0.813: 69.85,59.05 69.85,62.23 | 69.85,52.07 69.85,52.7 | 62.23,54.61 60.96,53.34 | 62.23,48.9 62.23,44.45
  Bottom 0.305: 27.94,53.34 35.56,53.34 | 41.27,56.52 51.44,56.52 54.61,53.34 60.96,53.34 | 69.85,60.96 70.48,60.33 89.22,60.33 89.85,59.69 110.49,59.69 111.44,58.74 v128.27,58.74 | 63.5,53.34 68.58,53.34 | v139.7,83.82 144.78,83.82 | v128.27,64.77 135.89,64.77 v136.53,65.41 | 147.32,73.66 137.16,73.66 v136.53,74.3
  Bottom 0.813: 26.67,52.07 27.94,53.34 | 35.56,53.34 36.83,52.07 41.27,56.52 | 60.96,53.34 62.23,54.61 63.5,53.34 | 69.85,62.23 69.85,60.96 | 68.58,53.34 69.85,52.07 | 144.78,83.82 146.05,85.09 | 147.32,73.66 148.59,72.39
C3  (via drill 0.61 pad 1.02)
  Top 0.305: v73.66,55.88 73.66,53.34 73.03,52.7 | 72.39,42.55 71.12,43.81 71.12,45.72 73.66,48.26 73.66,50.8 | v48.9,57.78 48.9,56.52 50.16,55.24 v50.16,44.45 v50.16,34.29 | 59.69,28.57 57.78,30.48 57.78,32.38 58.42,33.02
  Top 0.813: 72.39,62.23 72.39,59.05 73.66,57.78 v73.66,55.88 | 73.03,52.7 72.39,52.07 73.66,50.8 | 72.39,42.55 72.39,41.91 | 59.69,28.57 59.69,24.13 | 59.69,34.29 58.42,33.02
  Bottom 0.305: 27.94,43.18 35.56,43.18 | 57.78,44.45 57.15,45.09 52.7,45.09 52.07,44.45 v50.16,44.45 45.72,44.45 43.18,41.91 | v48.9,57.78 52.07,57.78 55.24,54.61 59.69,54.61 | v50.16,34.29 56.52,34.29 | 59.69,55.88 60.33,56.52 73.03,56.52 v73.66,55.88
  Bottom 0.813: 26.67,41.91 27.94,43.18 | 35.56,43.18 36.83,41.91 43.18,41.91 | 57.78,44.45 59.69,44.45 | 59.69,54.61 59.69,55.88 | 56.52,34.29 59.69,34.29
CLK
  Top 0.305: 140.97,16.51 139.7,17.78 139.7,26.04 138.43,27.3 138.43,29.84 139.7,31.11 139.7,39.37 140.97,40.64
  Top 0.813: 140.97,13.97 140.97,16.51 | 140.97,40.64 140.97,41.91
  Bottom 0.305: 139.06,12.06 133.99,12.06 132.72,10.79 107.31,10.79 104.78,8.26 90.81,8.26 88.9,6.35 12.06,6.35 10.79,7.62
  Bottom 0.813: 139.06,12.06 140.97,13.97
  Bottom 1.27: 7.62,7.62 10.79,7.62
CLK1  (via drill 0.61 pad 1.02)
  Top 0.305: 27.94,73.66 27.94,64.14 28.57,63.5 30.48,63.5 30.48,60.96 31.75,59.69 | 30.48,33.02 29.84,32.38 28.57,32.38 27.94,33.02 27.94,36.83 30.48,39.37 30.48,43.18 28.57,43.18 27.94,43.81 27.94,52.7 28.57,53.34 29.84,53.34 31.11,54.61 | v53.66,31.11 53.66,26.35 v55.24,24.77 | v67.94,76.83 67.94,78.74 68.58,79.38 68.58,83.82 | 68.58,86.36 67.94,87 61.59,87 v60.96,86.36 | v47.62,81.92 v47.62,85.72
  Top 0.813: 29.21,85.09 31.75,82.55 31.75,81.28 29.21,78.74 29.21,74.93 27.94,73.66 | 30.48,63.5 31.75,64.77 | 31.75,59.69 31.75,54.61 31.11,54.61 | 30.48,33.02 31.75,34.29 | 30.48,43.18 31.75,44.45 | v153.67,18.41 153.67,21.59 | 68.58,86.36 69.85,85.09 68.58,83.82 | 67.31,64.77 67.31,69.53 v68.58,70.8
  Bottom 0.305: 29.21,87.63 29.84,88.27 33.66,88.27 35.56,90.17 35.56,93.98 34.92,94.61 32.38,94.61 31.75,93.98 | 31.75,33.02 32.38,32.38 37.15,32.38 38.42,33.66 46.67,33.66 49.21,31.11 v53.66,31.11 | v153.67,18.41 127.64,18.41 123.83,22.23 102.87,22.23 99.06,18.41 68.58,18.41 66.04,20.95 58.42,20.95 55.24,24.13 v55.24,24.77 | v68.58,70.8 68.58,76.2 v67.94,76.83 | v60.96,86.36 58.42,86.36 57.78,85.72 v47.62,85.72 | v47.62,81.92 45.09,81.92 43.81,80.64 33.66,80.64
  Bottom 0.813: 29.21,85.09 29.21,87.63 | 31.75,93.98 31.75,92.71 | 31.75,34.29 31.75,33.02 | 31.75,82.55 33.66,80.64
CLK2  (via drill 0.61 pad 1.02)
  Top 0.305: 69.85,76.83 68.58,75.56 68.58,73.66 | v121.28,55.88 120.97,56.2 120.97,61.91 121.6,62.55 121.6,63.5 120.65,64.45 120.65,66.04 121.28,66.67 121.28,78.74 v121.6,79.06 | v110.49,18.41 110.49,21.59 109.22,22.86 | 109.22,48.26 109.22,50.8
  Top 0.813: 69.85,82.55 69.85,76.83 | 68.58,73.66 69.85,72.39 | 109.22,22.86 109.22,24.13 109.22,31.75 109.22,34.29 109.22,41.91 109.22,44.45 109.22,48.26 | 109.22,50.8 109.22,52.07
  Bottom 0.305: 151.13,15.24 150.5,15.88 137.16,15.88 135.89,14.61 130.18,14.61 | 70.48,81.92 71.75,80.64 78.11,80.64 79.69,79.06 v121.6,79.06 | v110.49,18.41 123.83,18.41 125.73,16.51 | 109.86,52.7 110.49,53.34 112.39,53.34 113.03,52.7 113.03,51.44 113.67,50.8 116.2,50.8 v121.28,55.88
  Bottom 0.813: 151.13,15.24 151.13,13.97 | 70.48,81.92 69.85,82.55 | 130.18,14.61 R22. 127.64,14.61 125.73,16.51 | 109.22,52.07 109.86,52.7
CLKOUT  (via drill 0.61 pad 1.02)
  Top 0.305: v130.81,12.7 v130.81,20.32
  Bottom 0.305: 51.44,20.32 54.61,20.32 56.52,18.41 64.77,18.41 67.31,15.88 66.67,15.88 69.22,13.34 89.53,13.34 90.81,14.61 124.46,14.61 126.36,12.7 v130.81,12.7 | 146.05,20.32 145.41,19.68 131.44,19.68 v130.81,20.32
  Bottom 0.813: 51.44,22.23 51.44,20.32 | 146.05,20.32 146.05,21.59
CMD0
  Top 1.27: 7.62,27.94 9.53,27.94
  Bottom 0.305: 8.89,27.94 13.34,32.38 13.34,76.2 17.14,80.01 19.68,80.01 20.32,79.38 26.04,79.38 27.94,81.28 27.94,83.82
  Bottom 0.813: 7.62,27.94 8.89,27.94 | 27.94,83.82 26.67,85.09
CMD1
  Top 1.27: 3.17,27.94 5.08,27.94
  Bottom 0.305: 6.35,29.21 8.89,29.21 12.06,32.38 12.06,76.83 16.51,81.28 20.32,81.28 20.95,80.64 24.77,80.64 25.4,81.28 25.4,88.27 26.67,89.53 32.38,89.53 34.29,91.44
  Bottom 0.813: 5.08,27.94 6.35,29.21 | 34.29,91.44 34.29,92.71
  Bottom 1.27: 5.08,27.94 3.17,27.94
CMD2  (via drill 0.61 pad 1.02)
  Top 0.305: v13.97,80.64 13.97,78.74 v15.88,76.83
  Top 0.813: 7.62,30.48 9.53,30.48
  Bottom 0.305: 8.89,30.48 10.79,32.38 10.79,77.47 v13.97,80.64 | v15.88,76.83 24.77,76.83 25.4,76.2
  Bottom 0.61: 7.62,30.48 8.89,30.48
  Bottom 0.813: 25.4,76.2 26.67,74.93
CMD3  (via drill 0.61 pad 1.02)
  Top 0.305: v19.68,90.17 36.2,90.17 v38.1,88.27
  Top 1.27: 3.17,30.48 5.08,30.48
  Bottom 0.305: 6.35,31.75 8.89,31.75 9.53,32.38 9.53,82.55 12.7,85.72 19.05,85.72 19.68,86.36 v19.68,90.17 | 35.56,83.82 35.56,86.36 37.47,88.27 v38.1,88.27
  Bottom 0.813: 5.08,30.48 6.35,31.75 | 35.56,83.82 34.29,82.55
  Bottom 1.27: 5.08,30.48 3.17,30.48
D_IN
  Top 0.305: 148.59,74.3 149.86,73.03 149.86,68.58 147.32,66.04 147.32,64.14 146.05,62.87 | 146.05,52.7 144.78,53.98 144.78,59.05 146.05,60.33 146.05,62.23
  Top 0.813: 148.59,74.3 148.59,74.93 | 146.05,62.23 146.05,62.87 | 146.05,52.07 146.05,52.7
DIN  (via drill 0.61 pad 1.02)
  Top 0.305: 10.79,33.02 12.7,34.92 18.41,34.92 20.95,32.38 22.86,32.38 26.04,29.21 32.38,29.21 v33.02,28.57 | v119.38,31.11 119.38,38.73 121.28,40.64 121.28,41.91 120.65,42.55 120.65,54.93 120.02,55.56 120.02,62.55 v120.33,62.87
  Top 0.813: 7.62,33.02 10.79,33.02
  Bottom 0.305: v33.02,28.57 38.1,28.57 39.37,29.84 53.98,29.84 54.29,30.16 70.17,30.16 71.12,29.21 83.82,29.21 86.36,31.75 88.27,31.75 88.9,31.11 91.44,31.11 93.98,33.66 94.61,33.66 98.11,30.16 118.43,30.16 v119.38,31.11 | v120.33,62.87 135.57,62.87 137.79,60.64 142.88,60.64 143.51,60.01 149.86,60.01 151.13,61.28
  Bottom 0.813: 151.13,61.28 151.13,62.23
DOUT  (via drill 0.61 pad 1.02)
  Top 0.305: 6.35,31.75 12.06,31.75 13.97,33.66 18.41,33.66 20.95,31.11 22.86,31.11 26.04,27.94 30.48,27.94 v32.38,26.04
  Top 0.813: 5.08,33.02 6.35,31.75
  Top 1.27: 3.17,33.02 5.08,33.02
  Bottom 0.305: 142.24,33.02 137.48,33.02 137.16,33.34 131.13,33.34 130.81,33.02 123.83,33.02 120.02,29.21 97.16,29.21 96.2,30.16 88.58,30.16 85.72,27.3 70.17,27.3 69.22,28.26 54.93,28.26 53.98,27.3 40.01,27.3 38.73,26.04 v32.38,26.04
  Bottom 0.813: 142.24,33.02 143.51,31.75
  Bottom 1.27: 5.08,33.02 3.17,33.02
GND  (via drill 0.61 pad 1.02)
  Top 0.813: v138.43,2.54 138.43,7.62 | v133.35,2.54 C22. | C36. 60.33,11.43 58.42,9.53 58.42,2.54
  Top 1.27: 40.64,34.29 36.83,34.29 | 40.64,74.93 36.83,74.93 | 40.64,64.77 36.83,64.77 | 40.64,44.45 36.83,44.45 | 40.64,54.61 36.83,54.61 | 78.74,85.09 74.93,85.09 | 78.74,64.77 74.93,64.77 | 78.74,74.93 74.93,74.93 | 78.74,24.13 74.93,24.13 | 78.74,34.29 74.93,34.29 | 78.74,44.45 74.93,44.45 | 78.74,54.61 74.93,54.61 | 114.3,85.09 117.47,85.09 118.11,85.72 118.11,87 | 117.47,74.93 114.3,74.93 | 117.47,64.77 114.3,64.77 | 117.47,54.61 114.3,54.61 | 117.47,44.45 114.3,44.45 | 117.47,34.29 114.3,34.29 | 117.47,24.13 114.3,24.13 | 157.48,74.93 153.67,74.93 | 157.48,54.61 153.67,54.61 | 157.48,44.45 153.67,44.45 | 157.48,34.29 153.67,34.29 | v157.48,13.97 153.67,13.97 | v157.48,24.13 153.67,24.13 | 157.48,85.09 153.67,85.09 | 157.48,64.77 153.67,64.77
  Top 1.778: 35.56,2.54 35.56,29.21 40.64,34.29 40.64,44.45 40.64,54.61 40.64,64.77 40.64,74.93 40.64,85.09 36.83,85.09 36.83,86.36 35.56,87.63 C7. | 35.56,2.54 58.42,2.54 v71.12,2.54 v80.01,2.54 | 35.56,2.54 6.35,2.54 6.35,5.08 SV1. 5.08,5.08 5.08,7.62 5.08,10.16 5.08,12.7 5.08,15.24 5.08,17.78 5.08,20.32 | v80.01,2.54 80.01,22.86 78.74,24.13 78.74,34.29 78.74,44.45 78.74,54.61 78.74,64.77 78.74,74.93 78.74,85.09 | v80.01,2.54 v96.52,2.54 v118.11,2.54 | v118.11,2.54 118.11,23.5 117.47,24.13 117.47,34.29 117.47,44.45 117.47,54.61 117.47,64.77 117.47,74.93 117.47,85.09 | v118.11,2.54 v133.35,2.54 v138.43,2.54 v149.86,2.54 157.48,10.16 v157.48,13.97 v157.48,24.13 157.48,34.29 157.48,44.45 157.48,54.61 157.48,64.77 157.48,74.93 157.48,85.09
  Bottom 0.305: C10. 50.8,67.94
  Bottom 0.61: 150.5,57.47 146.69,57.47
  Bottom 0.813: 148.59,68.58 147.96,67.94 C27. | 146.69,57.47 145.41,58.74 142.56,58.74 | 151.76,46.35 146.69,46.35 146.05,46.99 142.88,46.99 142.56,47.31 | C22. 133.99,17.14 151.76,17.14 153.67,15.24 153.67,13.97 | 93.98,26.04 113.03,26.04 114.3,24.77 114.3,24.13 | 93.98,26.04 C21. | C20. 94.61,37.47 112.39,37.47 114.3,35.56 114.3,34.29 | C19. 94.3,46.04 113.35,46.04 114.3,45.09 114.3,44.45 | C18. 94.3,57.47 109.86,57.47 110.81,56.52 113.03,56.52 114.3,55.24 114.3,54.61 | C15. 95.25,88.9 113.03,88.9 114.3,87.63 114.3,85.09 | C16. 94.3,77.79 113.35,77.79 114.3,76.83 114.3,74.93 | C17. 94.3,67.63 113.03,67.63 114.3,66.36 114.3,64.77 | C8. 56.52,88.27 73.03,88.27 74.93,86.36 74.93,85.09 | C9. 56.52,78.11 63.5,78.11 64.14,78.74 66.36,78.74 66.99,79.38 69.85,79.38 71.12,78.11 73.03,78.11 74.93,76.2 74.93,74.93 | C10. 57.15,69.22 65.41,69.22 66.67,67.94 73.66,67.94 74.93,66.67 74.93,64.77 | C11. 56.52,57.78 74.93,57.78 75.56,57.15 75.56,55.24 74.93,54.61 | C14. 56.52,26.04 73.66,26.04 74.93,24.77 74.93,24.13 | C13. 56.52,36.2 73.66,36.2 74.93,34.92 74.93,34.29 | C12. 57.15,46.99 57.78,46.35 73.66,46.35 74.93,45.09 74.93,44.45 | C2. 18.41,36.2 35.56,36.2 36.83,34.92 36.83,34.29 | C3. 19.05,48.26 22.23,48.26 24.13,46.35 34.92,46.35 36.83,44.45 | C4. 18.41,56.52 35.56,56.52 36.83,55.24 36.83,54.61 | C5. 18.41,66.67 36.2,66.67 36.83,66.04 36.83,64.77 | C6. 34.92,78.11 36.83,76.2 36.83,74.93 | v138.43,2.54 138.43,7.62 | 48.26,69.22 49.53,69.22 50.8,67.94 | 93.98,26.04 93.98,22.86
  Bottom 1.27: C7. C30. | C29. 135.25,87.63 135.89,88.27 151.76,88.27 153.67,86.36 153.67,85.09 | C28. 133.67,77.79 151.45,77.79 153.67,75.56 153.67,74.93 | 148.59,68.58 150.5,68.58 153.67,65.41 153.67,64.77 | 153.67,24.13 153.67,26.04 151.76,27.94 140.97,27.94 140.34,27.3 133.99,27.3 C23. 130.81,26.67 130.18,27.3 126.36,27.3 | C24. 151.76,36.83 153.67,34.92 153.67,34.29 | 153.67,54.61 153.67,54.93 151.13,57.47 150.5,57.47 | 142.56,58.74 136.21,58.74 C26. | 142.56,47.31 133.67,47.31 C25. | 153.67,44.45 153.67,45.09 152.4,46.35 151.76,46.35 | 6.35,5.08 5.08,5.08 | 6.35,5.08 SV1. | 6.35,3.81 6.35,5.08 | v157.48,13.97 153.67,13.97 | 88.27,74.3 88.9,74.3 92.08,77.47 C16.
  Bottom 1.778: 5.08,20.32 5.08,17.78 5.08,15.24 5.08,12.7 5.08,10.16 5.08,7.62 5.08,5.08
  Bottom 2.54: 6.35,3.81 6.35,2.54 v71.12,2.54 v80.01,2.54 v96.52,2.54 v118.11,2.54 v133.35,2.54 v138.43,2.54 v149.86,2.54 157.48,10.16 v157.48,13.97 v157.48,24.13
  pour Top (isolate 0.356): 2.54,1.27 158.75,1.27 158.75,86.36 149.86,86.36 149.86,17.78 119.38,17.78 119.38,87.63 111.76,87.63 111.76,27.94 81.28,27.94 81.28,88.9 71.12,88.9 71.12,27.94 43.18,27.94 43.18,91.44 35.56,91.44 35.56,35.56 27.94,27.94 27.94,6.99 6.99,6.99 6.99,20.32 2.54,20.32
  pour Bottom (isolate 0.356): 2.54,1.27 2.54,20.95 5.71,20.95 5.71,6.35 6.99,5.08 149.86,5.08 153.67,8.89 153.67,15.24 156.21,17.78 156.21,26.67 158.75,29.21 158.75,1.27
I_EN  (via drill 0.61 pad 1.02)
  Top 0.305: v125.41,82.55 125.09,82.23 125.09,79.06 125.73,78.42 125.73,74.93 125.09,74.3 125.09,68.9 v126.05,67.94
  Bottom 0.305: 105.41,83.82 113.03,83.82 | 147.96,62.87 147.32,63.5 127.32,63.5 126.05,64.77 v126.05,67.94 | 116.2,82.55 v125.41,82.55
  Bottom 0.813: 104.14,82.55 105.41,83.82 | 113.03,83.82 114.3,82.55 116.2,82.55 | 147.96,62.87 148.59,62.23
N$1
  Top 2: 20,-1 -1,-1 -1,20
N$2
  Top 2: 140,-1 161,-1 161,20
N$3
  Top 2: 20,101 -1,101 -1,80
N$4
  Top 2: 161,80 161,101 140,101
N$5
  Bottom 2: 20,-1 -1,-1 -1,20
N$6
  Bottom 2: 140,-1 161,-1 161,20
N$7
  Bottom 2: 20,101 -1,101 -1,80
N$8
  Bottom 2: 161,80 161,101 140,101
N$9
  Top 0.305: 35.56,83.82 35.56,80.01 33.02,77.47 33.02,73.66 31.11,73.66 30.48,73.03 30.48,71.12 29.21,69.85
  Top 0.813: 35.56,83.82 34.29,85.09 | 29.21,64.77 29.21,69.85 | 33.02,73.66 34.29,72.39
N$10  (via drill 0.61 pad 1.02)
  Top 0.305: 36.83,92.71 40.01,92.71 43.81,88.9 v43.81,66.67
  Top 0.813: 29.21,54.61 v29.21,60.33
  Bottom 0.305: 35.56,63.5 38.1,63.5 41.27,66.67 v43.81,66.67 | v29.21,60.33 32.38,60.33 33.02,60.96
  Bottom 0.813: 35.56,63.5 34.29,62.23 33.02,60.96
N$11
  Top 0.305: 35.56,73.66 35.56,60.96 36.2,60.33 36.2,56.52 35.56,55.88 35.56,53.34 | 29.21,50.16 30.48,51.44 30.48,52.7 31.11,53.34 33.02,53.34
  Top 0.813: 35.56,73.66 34.29,74.93 | 35.56,53.34 34.29,52.07 33.02,53.34 | 29.21,44.45 29.21,50.16
N$12  (via drill 0.61 pad 1.02)
  Top 0.305: 35.56,43.18 35.56,46.99 v37.47,48.9 | v42.55,53.98 v42.55,82.55
  Top 0.813: 29.21,34.29 29.21,35.56 34.29,40.64 34.29,41.91 35.56,43.18
  Bottom 0.305: v37.47,48.9 v42.55,53.98
  Bottom 0.813: v42.55,82.55 36.83,82.55
N$13
  Top 0.305: 24.13,38.1 25.4,36.83 25.4,33.02 27.3,31.11 31.11,31.11 31.75,31.75
  Top 0.813: 24.13,38.1 24.13,41.91 | 31.75,31.75 34.29,34.29
N$14  (via drill 0.61 pad 1.02)
  Top 0.813: v31.11,50.16 34.29,46.99 34.29,44.45
  Bottom 0.305: 24.77,51.44 26.04,50.16 v31.11,50.16
  Bottom 0.813: 24.13,52.07 24.77,51.44
N$15  (via drill 0.61 pad 1.02)
  Top 0.813: v34.29,58.42 34.29,54.61
  Bottom 0.305: 24.13,60.33 26.67,57.78 33.66,57.78 v34.29,58.42
  Bottom 0.813: 24.13,60.33 24.13,62.23
N$16  (via drill 0.61 pad 1.02)
  Top 0.305: v32.38,69.22 34.29,67.31
  Top 0.813: 34.29,67.31 34.29,64.77
  Bottom 0.305: v32.38,69.22 26.04,69.22 24.13,71.12
  Bottom 0.813: 24.13,72.39 24.13,71.12
N$17
  Top 0.305: 58.42,17.78 60.96,20.32 60.96,48.26 58.42,50.8 58.42,55.88 60.96,58.42 60.96,66.04 62.23,67.31 62.23,71.75
  Top 0.813: 58.42,17.78 57.15,16.51 57.78,16.51 60.33,13.97 64.77,13.97 | 62.23,71.75 62.23,72.39 62.23,73.03
  Bottom 0.813: 53.98,18.41 55.88,16.51 57.15,16.51
N$18
  Bottom 0.406: 67.31,72.39 67.31,74.93
  Bottom 0.813: 64.77,72.39 65.41,71.75 66.67,71.75 67.31,72.39
N$19  (via drill 0.61 pad 1.02)
  Top 0.305: 59.69,66.67 60.96,67.94 v60.96,71.12 60.96,81.28
  Top 0.813: 59.69,64.77 59.69,66.67 | 60.96,81.28 62.23,82.55
  Bottom 0.305: 74.3,71.75 72.07,69.53 66.67,69.53 65.72,70.48 61.59,70.48 v60.96,71.12
  Bottom 0.813: 74.3,71.75 74.93,72.39
N$20  (via drill 0.61 pad 1.02)
  Top 0.813: v76.2,77.47 74.93,78.74 74.93,82.55
  Bottom 0.305: v76.2,77.47 76.83,76.83 76.83,74.3 76.2,73.66 73.66,73.66 73.66,75.56 72.39,76.83 70.48,76.83 69.22,78.11 67.31,78.11 66.67,77.47 64.45,77.47 63.82,76.83 60.33,76.83 59.69,76.2
  Bottom 0.813: 69.85,74.93 72.39,72.39 73.66,73.66 | 59.69,74.93 59.69,76.2
N$21
  Top 0.813: 72.39,74.93 72.39,82.55
N$22  (via drill 0.61 pad 1.02)
  Top 0.305: 63.5,83.82 63.5,69.22 64.77,67.94 | v45.09,32.38 45.09,49.53 46.35,50.8 v46.35,63.5
  Top 0.813: 63.5,83.82 62.23,85.09 | 64.77,64.77 64.77,67.94
  Bottom 0.305: 24.77,31.11 26.04,29.84 37.78,29.84 39.05,31.11 43.81,31.11 v45.09,32.38 | 72.39,86.36 71.75,87 64.14,87 62.87,85.72 | v46.35,63.5 46.67,63.82 51.44,63.82 52.7,65.09 56.83,65.09 58.42,66.67 64.14,66.67 64.77,66.04
  Bottom 0.813: 72.39,86.36 72.39,85.09 | 62.23,85.09 62.87,85.72 | 64.77,66.04 64.77,64.77 | 21.59,34.29 24.77,31.11
N$23
  Top 0.305: 72.39,90.81 73.66,89.53 73.66,69.22 72.39,67.94
  Top 0.813: 72.39,90.81 72.39,92.71 | 72.39,64.77 72.39,67.94
  Bottom 0.305: 63.5,91.44 64.14,90.81 65.41,90.81 66.04,91.44 66.04,93.98 66.67,94.61 71.75,94.61 72.39,93.98
  Bottom 0.813: 63.5,91.44 62.23,92.71 | 72.39,92.71 72.39,93.98
N$24
  Top 0.305: 71.12,88.27 59.69,88.27 59.05,87.63 | 71.12,88.27 71.12,93.98 71.75,94.61 74.3,94.61 74.93,93.98 | 69.85,67.94 71.12,69.22 71.12,88.27
  Top 0.813: 59.05,87.63 59.05,85.72 59.69,85.09 | 74.93,93.98 74.93,92.71 | 69.85,64.77 69.85,67.94
N$25
  Bottom 0.61: 64.77,85.09 67.31,85.09
N$26
  Top 0.305: 109.22,67.31 105.41,71.12 105.41,76.2 102.23,79.38 100.97,79.38 100.33,80.01 100.33,83.19 100.97,83.82 104.78,83.82 105.41,84.45 105.41,89.53 106.68,90.81
  Top 0.813: 109.22,64.77 109.22,67.31 | 106.68,90.81 106.68,92.71
N$27  (via drill 0.61 pad 1.02)
  Top 0.305: v120.02,41.27 119.7,41.59 119.7,54.61 119.06,55.24 119.06,82.23 120.65,83.82
  Top 0.813: 104.14,41.91 104.14,40.01 106.68,37.47 106.68,34.29 | 120.65,83.82 R24.
  Bottom 0.305: 101.6,35.56 102.23,36.2 106.05,36.2 106.68,35.56 | 104.78,41.91 106.05,43.18 116.84,43.18 118.75,41.27 v120.02,41.27
  Bottom 0.813: 101.6,34.29 101.6,35.56 | 106.68,35.56 106.68,34.29 | 104.14,41.91 104.78,41.91
  Bottom 1.27: R24. 120.65,88.27 119.38,89.53 C34.
N$28
  Top 0.813: 64.77,82.55 64.77,74.93
  Bottom 0.305: 24.13,94.61 26.67,97.16 38.1,97.16 41.27,93.98 41.27,87 43.81,84.45 58.42,84.45 59.05,83.82 63.5,83.82
  Bottom 0.813: 24.13,92.71 24.13,94.61 | 63.5,83.82 64.77,82.55
N$29  (via drill 0.61 pad 1.02)
  Top 0.813: 62.23,74.93 v62.23,80.64
  Bottom 0.305: v62.23,80.64 62.55,80.96 65.72,80.96 66.67,81.92
  Bottom 0.813: 66.67,81.92 67.31,82.55
N$30
  Top 0.305: 26.67,64.14 27.94,62.87 27.94,60.96 24.13,57.15
  Top 0.813: 26.67,64.14 26.67,64.77 | 24.13,54.61 24.13,57.15
N$31
  Top 0.813: 24.13,74.93 24.13,82.55
  Bottom 0.305: 22.86,83.82 22.86,87.63 26.67,91.44
  Bottom 0.61: 21.59,74.93 24.13,74.93
  Bottom 0.813: 24.13,82.55 22.86,83.82 | 26.67,91.44 26.67,92.71
N$32
  Bottom 1.27: LED2. 3.81,76.2 5.08,74.93 R5.
N$33  (via drill 0.61 pad 1.02)
  Top 0.305: v88.9,40.64 v88.9,71.12
  Top 0.813: 101.6,72.39 101.6,71.12 106.68,66.04 106.68,64.77
  Bottom 0.305: 114.3,40.64 113.67,40.01 92.08,40.01 91.44,40.64 v88.9,40.64 | v88.9,71.12 89.22,70.8 100.97,70.8 101.6,71.44
  Bottom 0.813: 114.3,40.64 114.3,41.91 | 101.6,71.44 101.6,72.39
N$34  (via drill 0.61 pad 1.02)
  Top 0.305: v94.61,44.13 94.93,44.45 94.93,53.02 94.3,53.66 94.3,55.24 95.89,56.83 95.89,62.87 94.61,64.14 v94.61,65.41
  Bottom 0.305: 99.06,66.36 99.06,66.04 | 99.06,66.36 111.12,66.36 111.76,65.72 | 100.33,43.18 95.57,43.18 v94.61,44.13 | v94.61,65.41 95.57,66.36 99.06,66.36
  Bottom 0.813: 111.76,65.72 111.76,64.77 | 100.33,43.18 101.6,41.91 | 99.06,66.04 99.06,64.77
N$35  (via drill 0.61 pad 1.02)
  Top 0.305: 111.76,34.29 111.76,41.91 | 111.76,69.85 110.49,68.58 110.49,64.14 111.12,63.5 112.39,63.5 113.03,62.87 v113.03,59.75 113.03,43.18 | 102.87,63.5 102.87,61.59 103.82,60.64 105.09,60.64 v105.41,60.96
  Top 0.813: 111.76,41.91 113.03,43.18 | 111.76,69.85 111.76,72.39 | 102.87,63.5 101.6,64.77
  Bottom 0.305: v105.41,60.96 105.73,60.64 110.49,60.64 111.38,59.75 v113.03,59.75
N$36  (via drill 0.61 pad 1.02)
  Top 0.305: 99.06,34.29 99.06,35.56 95.89,38.73 95.89,53.34 95.25,53.98 95.25,54.93 96.84,56.52 96.84,64.45 v96.52,64.77
  Bottom 0.305: 102.87,63.5 97.79,63.5 v96.52,64.77
  Bottom 0.813: 102.87,63.5 104.14,64.77
N$37
  Top 0.305: 99.69,45.09 100.33,45.72 100.33,52.7 99.69,53.34 98.42,53.34 97.79,53.98 97.79,66.04 96.52,67.31 96.52,74.93 98.42,76.83 99.69,76.83 100.33,76.2 100.33,74.3 100.97,73.66 102.87,73.66
  Top 0.813: 102.87,73.66 104.14,74.93 | 99.06,44.45 99.69,45.09
N$38
  Top 0.305: 109.22,78.74 110.49,80.01 110.49,83.82
  Top 0.813: 109.22,74.93 109.22,78.74 | 110.49,83.82 111.76,85.09
N$39  (via drill 0.61 pad 1.02)
  Top 0.305: v87.63,52.7 87.63,71.75 86.36,73.03
  Top 0.813: 101.6,44.45 101.6,49.21 104.14,51.75 104.14,52.07 | 86.36,73.03 85.72,73.66 C33.
  Top 1.27: C33. R25.
  Bottom 0.305: 102.87,43.18 104.78,43.18 106.05,44.45 | 104.14,52.07 104.14,51.12 102.23,49.21 95.89,49.21 94.61,50.48 91.76,50.48 89.53,52.7 v87.63,52.7
  Bottom 0.813: 101.6,44.45 102.87,43.18 | 106.05,44.45 106.68,44.45 | C33. R25.
N$40  (via drill 0.61 pad 1.02)
  Top 0.305: 106.68,76.83 102.87,80.64 102.23,80.64 101.6,81.28 | 107.95,73.66 112.39,73.66 113.03,73.03 113.03,64.14 113.67,63.5 114.94,63.5 115.57,62.87 v115.57,56.52
  Top 0.813: 101.6,81.28 101.6,82.55 | 106.68,76.83 106.68,74.93 107.95,73.66
  Bottom 0.305: 116.2,53.34 116.2,55.88 v115.57,56.52
  Bottom 0.813: 114.3,52.07 114.94,52.07 116.2,53.34
N$41
  Top 0.305: 101.6,52.7 100.33,53.98 100.33,66.04 97.79,68.58 97.79,73.66 98.42,74.3
  Top 0.813: 98.42,74.3 99.06,74.93 | 101.6,52.07 101.6,52.7
  Bottom 0.305: 99.06,75.88 99.69,76.52 111.12,76.52 111.76,75.88
  Bottom 0.813: 99.06,74.93 99.06,75.88 | 111.76,75.88 111.76,74.93
N$42  (via drill 0.61 pad 1.02)
  Top 0.305: 111.76,44.45 111.76,52.07 | 101.6,76.83 97.79,80.64 v97.79,87 | 113.03,83.82 113.03,86.36 v112.39,87 | v122.87,54.61 122.87,56.2 121.92,57.15 121.92,61.91 122.24,62.23 122.24,64.14 121.6,64.77 121.6,65.72 122.24,66.36 122.24,77.47 122.87,78.11 v122.87,81.28
  Top 0.813: 101.6,76.83 101.6,74.93 | 111.76,82.55 113.03,83.82
  Bottom 0.305: v112.39,87 111.76,87.63 100.97,87.63 100.33,87 v97.79,87 | v122.87,81.28 113.03,81.28 | 111.76,51.44 113.67,49.53 117.79,49.53 v122.87,54.61
  Bottom 0.813: 113.03,81.28 111.76,82.55 | 111.76,52.07 111.76,51.44
N$43  (via drill 0.61 pad 1.02)
  Top 0.305: v87.63,36.83 v87.63,50.16
  Bottom 0.305: 25.4,43.18 25.4,41.27 27.94,38.73 59.05,38.73 60.33,37.47 87,37.47 v87.63,36.83 | 107.95,53.34 107.95,51.12 108.58,50.48 111.44,50.48 112.08,49.85 112.08,48.9 111.44,48.26 95.57,48.26 94.3,49.53 91.44,49.53 90.81,50.16 v87.63,50.16
  Bottom 0.813: 25.4,43.18 26.67,44.45 | 107.95,53.34 109.22,54.61
N$44  (via drill 0.61 pad 1.02)
  Top 0.305: v96.52,54.61 96.52,53.98 96.84,53.66 96.84,52.39 99.06,50.16 99.06,46.99 97.79,45.72 97.79,40.64 102.87,35.56 102.87,33.02
  Top 0.813: 101.6,31.75 102.87,33.02
  Bottom 0.305: 100.33,55.88 100.65,56.2 109.54,56.2 111.12,54.61
  Bottom 0.61: v96.52,54.61 99.06,54.61
  Bottom 0.813: 99.06,54.61 100.33,55.88 | 111.12,54.61 111.76,54.61
N$45  (via drill 0.61 pad 1.02)
  Top 0.305: v105.41,33.02 105.41,36.83 102.87,39.37 102.87,46.35 104.46,47.94 v104.46,49.53
  Top 0.813: 101.6,62.23 101.6,60.96 106.68,55.88 106.68,54.61
  Bottom 0.305: v105.41,33.02 113.03,33.02 | v104.46,49.53 105.41,50.48 105.41,53.34
  Bottom 0.813: 113.03,33.02 114.3,31.75 | 105.41,53.34 106.68,54.61
N$46  (via drill 0.61 pad 1.02)
  Top 0.305: 99.06,27.94 100.33,29.21 100.33,36.2 96.84,39.69 96.84,50.16 v97.16,50.48
  Top 0.813: 99.06,24.13 99.06,27.94
  Bottom 0.305: v97.16,50.48 102.23,50.48 102.87,51.12 102.87,53.34
  Bottom 0.813: 102.87,53.34 104.14,54.61
N$47  (via drill 0.61 pad 1.02)
  Top 0.305: 111.12,32.38 110.49,33.02 v110.49,49.4 110.49,59.37 111.76,60.64 111.76,62.23 | 102.23,53.98 102.87,53.34 104.78,53.34 105.41,52.7 105.41,50.48 v106.36,49.53
  Top 0.813: 111.76,24.13 111.76,31.75 111.12,32.38 | 102.23,53.98 101.6,54.61
  Bottom 0.305: v110.49,49.4 106.49,49.4 v106.36,49.53
N$48
  Top 1.27: 3.17,22.86 5.08,22.86
  Bottom 1.27: 5.08,22.86 3.17,22.86
N$49
  Top 0.813: 151.13,85.09 151.13,90.17 148.59,92.71
N$50  (via drill 0.61 pad 1.02)
  Top 0.813: 143.51,85.09 v143.51,90.17
  Bottom 0.305: v143.51,90.17 149.86,90.17 151.13,91.44
  Bottom 0.813: 151.13,91.44 151.13,92.71
N$51  (via drill 0.61 pad 1.02)
  Top 0.813: v155.57,38.1 154.31,39.37 154.31,41.27 153.67,41.91
  Bottom 0.305: 151.13,20.32 151.76,19.68 154.31,19.68 155.26,20.64 155.26,30.16 156.84,31.75 156.84,36.83 v155.57,38.1
  Bottom 0.813: 148.59,21.59 151.13,21.59 151.13,20.32
N$52  (via drill 0.61 pad 1.02)
  Top 0.305: v128.27,34.29 128.27,25.08 127.95,24.77
  Top 0.813: 127.95,22.23 127.95,24.77 C31.
  Bottom 0.305: 143.51,40.64 142.88,40.01 140.34,40.01 139.06,38.73 132.72,38.73 v128.27,34.29
  Bottom 0.813: 143.51,40.64 143.51,41.91 | 127.95,22.23 127.95,23.18 C31.
N$53  (via drill 0.61 pad 1.02)
  Top 0.305: v155.57,58.42 154.31,58.42 v152.4,60.33
  Top 0.813: v147.64,58.74 146.05,57.15 146.05,54.61
  Bottom 0.305: 155.57,92.71 158.12,90.17 158.12,59.69 156.84,58.42 v155.57,58.42 | v152.4,60.33 151.13,59.05 147.96,59.05 v147.64,58.74
  Bottom 0.813: 155.57,92.71 153.67,92.71
N$54  (via drill 0.61 pad 1.02)
  Top 0.305: 151.13,43.81 149.86,42.55 v149.86,38.73
  Top 0.813: 140.97,34.29 v140.97,38.73 | 151.13,43.81 151.13,44.45 151.13,45.72
  Bottom 0.305: v140.97,38.73 v149.86,38.73
N$55  (via drill 0.61 pad 1.02)
  Top 0.305: v152.4,39.37 152.4,48.9 153.67,50.16
  Top 0.813: 146.05,34.29 v146.05,40.01 | 153.67,50.16 153.67,52.07
  Bottom 0.305: v146.05,40.01 151.76,40.01 v152.4,39.37
N$56  (via drill 0.61 pad 1.02)
  Top 0.305: v153.67,78.74 153.03,78.74 151.13,76.83
  Top 0.813: 151.13,76.83 151.13,74.93
  Bottom 0.305: 149.86,33.02 154.94,33.02 155.57,33.66 155.57,35.56 154.31,36.83 154.31,40.01 156.84,42.55 156.84,55.24 154.31,57.78 154.31,59.05 156.84,61.59 156.84,78.11 156.21,78.74 v153.67,78.74
  Bottom 0.813: 148.59,34.29 149.86,33.02
N$57
  Top 0.305: 138.43,40.01 139.7,41.27 139.7,46.99 143.51,50.8
  Top 0.813: 138.43,34.29 138.43,40.01 | 143.51,50.8 143.51,52.07
N$58
  Top 0.305: 152.4,11.43 152.4,16.51 149.86,19.05 149.86,33.02
  Top 0.813: 151.13,10.16 152.4,11.43 | 149.86,33.02 151.13,34.29
N$59
  Bottom 0.305: 141.6,30.48 142.24,29.84 152.4,29.84 153.03,30.48
  Bottom 0.813: 153.67,31.75 153.67,31.11 153.03,30.48 | 141.6,30.48 140.97,31.11 140.97,31.75
N$60
  Bottom 0.305: 140.97,25.4 141.6,26.04 150.5,26.04 151.13,25.4
  Bottom 0.61: 138.43,24.13 140.97,24.13
  Bottom 0.813: 140.97,24.13 140.97,25.4 | 151.13,25.4 151.13,24.13
N$61
  Bottom 0.813: LED3. R7.